# Altium PCB dribblermotordriver.PcbDoc
Units mil, origin at the board's own origin, x right, y up, seen from the top; angles counter-clockwise.
Board outline 2330 x 1127.57 mil, 2 copper layers (Top Layer, Bottom Layer), stack 61.8 mil thick; 47 components, 47 nets, 228 pads, 238 vias.
Unrouted connection lines stored in the file: 7.
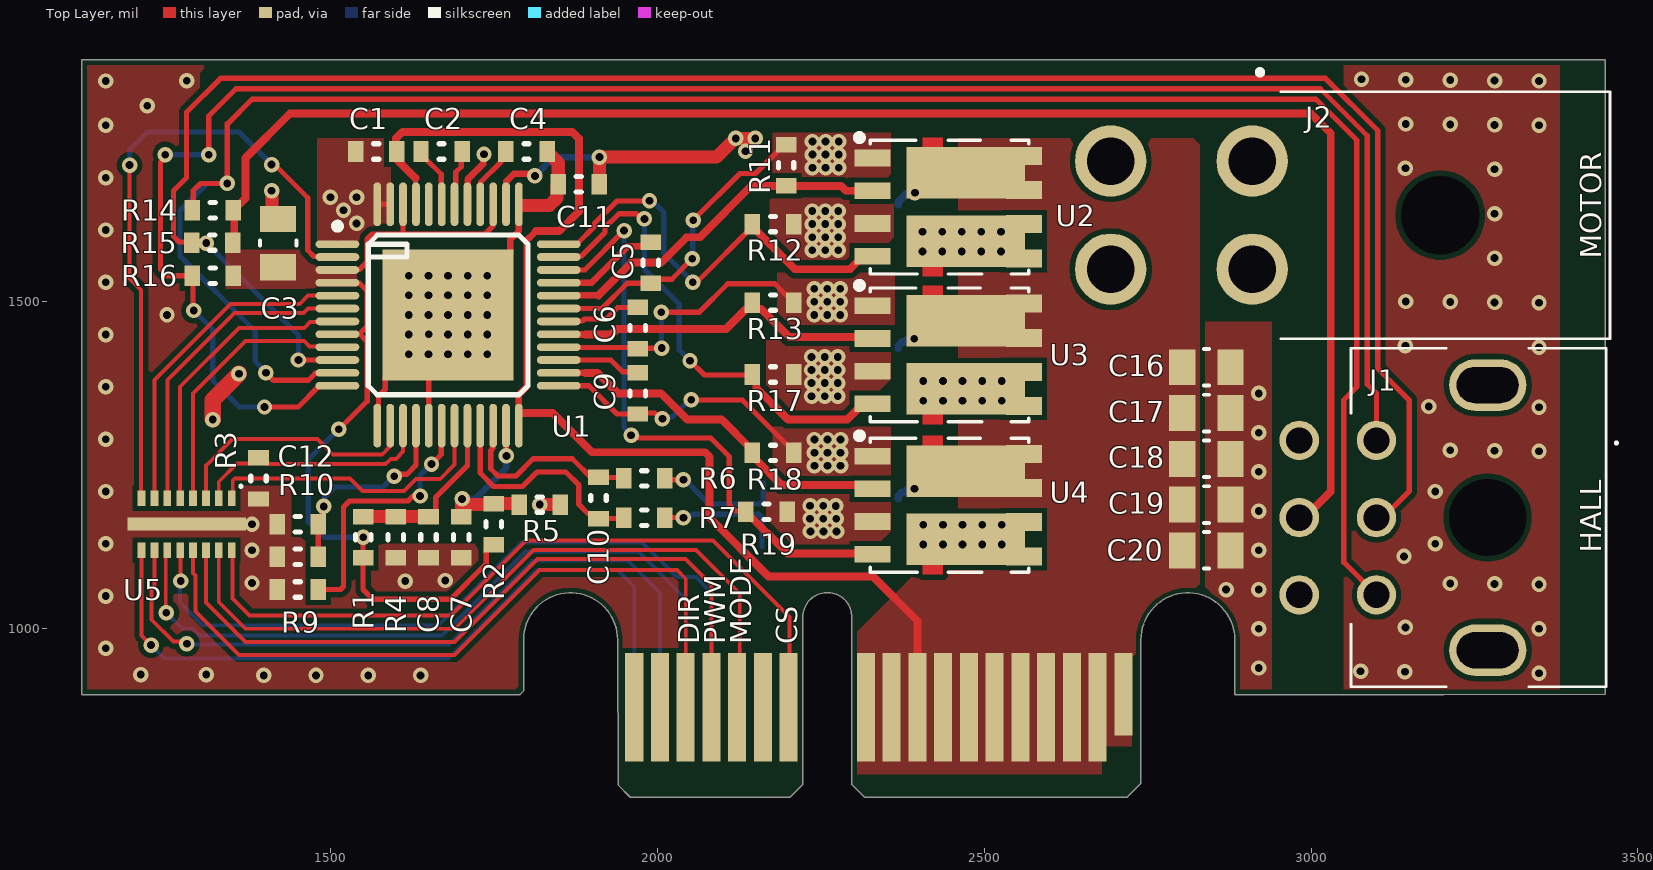
[diagram p0: Top Layer view]
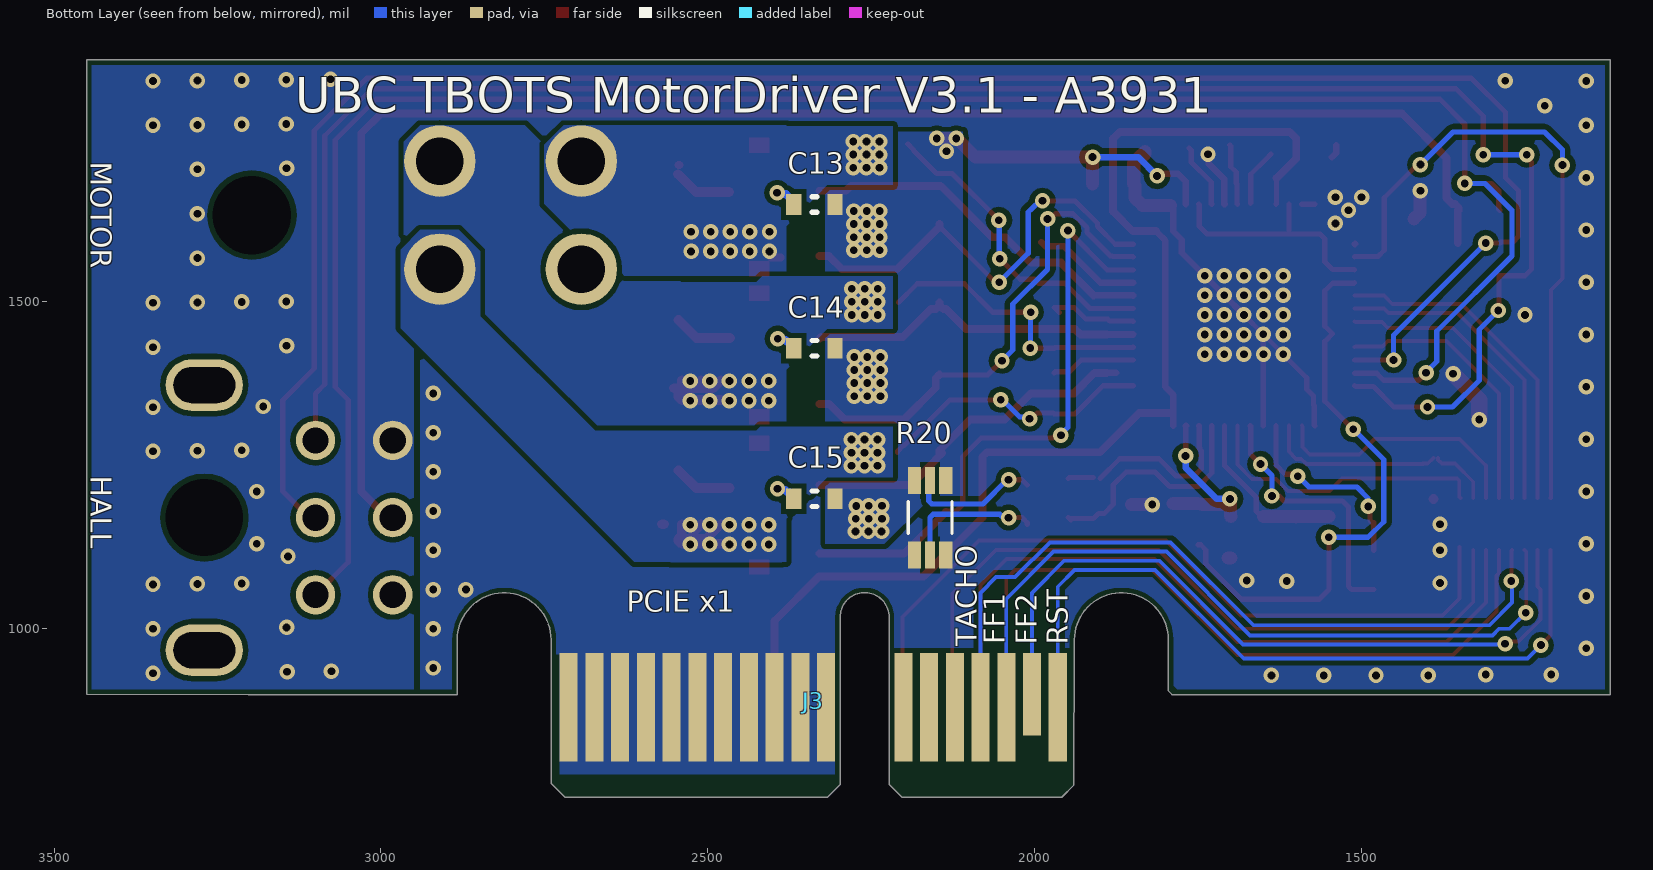
[diagram p1: Bottom Layer view, seen from below]

## Layer stack, top to bottom
Top Solder: solder mask 0.4, Solder Resist, Dk 3.5
Top Layer: signal copper 1.4
Dielectric 1: dielectric 59, FR-4, Dk 4.8
Bottom Layer: signal copper 1.4
Bottom Solder: solder mask 0.4, Solder Resist, Dk 3.5

## Board outline
1940,761.01 1958.57,742.43 2203.09,742.43 2222.69,762.03 2222.69,1017.99 cw(c2260.09,1017.99) 2297.49,1017.99 2297.49,761.57 2316.59,742.48 2718.89,742.48 2739.63,763.22 2739.63,983.02 cw(c2811.48,983.02) 2883.33,983.02 2883.33,899.37 3203.21,899.37 3450,899.85 3450,1870 1120,1870 1120,899.37 1790,899.37 1795.44,904.82 1795.44,983.2 cw(c1867.31,983.2) 1939.17,983.2

## Design rules (kind name [scope] priority, off if disabled: settings)
BoardOutlineClearance [All] p1: gap=7.87 ignorepadtopadclearanceinfootprint=FALSE except(15.75: Arc-SplitBarrior Arc-SplitContinuation Track-SplitBarrior Track-SplitContinuation SMDPad-SplitBarrior SMDPad-SplitContinuation THPad-SplitBarrior THPad-SplitContinuation Via-SplitBarrior Via-SplitContinuation Fill-SplitBarrior Fill-SplitContinuation Poly-SplitBarrior Poly-SplitContinuation Region-SplitBarrior Region-SplitContinuation Text-SplitBarrior Text-SplitContinuation)
Clearance "Clearance Bottom Layer" [OnLayer('Bottom Layer')] p1: gap=8 ignorepadtopadclearanceinfootprint=TRUE except(10: Arc-Text Track-Text SMDPad-Text THPad-Text Via-Text Fill-Text Poly-Text Region-Text Text-Text)
Clearance "Clearance Top Layer" [OnLayer('Top Layer')] p2: gap=8 ignorepadtopadclearanceinfootprint=TRUE except(10: Arc-Text Track-Text SMDPad-Text THPad-Text Via-Text Fill-Text Poly-Text Region-Text Text-Text)
Clearance [All] p3: gap=7.87 ignorepadtopadclearanceinfootprint=FALSE except(3.5: Arc-Arc Arc-Track Arc-SMDPad Track-Track Track-SMDPad SMDPad-SMDPad; 5: Arc-Via Track-Via SMDPad-Via THPad-Via Via-Via; 10: Arc-Text Track-Text SMDPad-Text THPad-Text Via-Text Fill-Text Poly-Text Region-Text Text-Text)
HoleSize [All] p1: absolutevalues=TRUE maxlimit=248.03 minlimit=7.87 maxpercent=80.000 minpercent=20.000
MinimumAnnularRing [All] p1: minimumring=3
MinimumSolderMaskSliver [All] p1: minsoldermaskwidth=3.94
PolygonConnect PolygonConnect_4 [All vs IsNamedPolygon('NONET_L01_P-001') Or IsNamedPolygon('NONET_L01_P-001') Or IsNamedPolygon('NONET_L01_P-001') Or IsNamedPolygon('NONET_L01_P-001') Or IsNamedPolygon('NONET_L01_P-001') Or IsNamedPolygon('NONET_L01_P-001') Or IsNamedPolygon('NONET_L01_P-001') Or IsNamedPolygon('NONET_L01_P-001') Or IsNamedPolygon('NONET_L01_P-001') Or IsNamedPolygon('NONET_L01_P-001') Or IsNamedPolygon('NONET_L01_P-001') Or IsNamedPolygon('NONET_L01_P-001') Or IsNamedPolygon('NONET_L01_P-001') Or IsNamedPolygon('NONET_L01_P-001') Or IsNamedPolygon('NONET_L01_P-001') Or IsNamedPolygon('NONET_L01_P-001') Or IsNamedPolygon('NONET_L01_P-001') Or IsNamedPolygon('NONET_L01_P-001') Or IsNamedPolygon('NONET_L01_P-001') Or IsNamedPolygon('NONET_L01_P-001') Or IsNamedPolygon('NONET_L01_P-001') Or IsNamedPolygon('NONET_L01_P-001')] p1: connectstyle=Direct reliefconductorwidth=10 reliefentries=4 polygonreliefangle="90 Angle" airgapwidth=10
PolygonConnect PolygonConnect_3 [All vs IsNamedPolygon('NONET_L01_P-001') Or IsNamedPolygon('NONET_L01_P-001') Or IsNamedPolygon('NONET_L01_P-001') Or IsNamedPolygon('NONET_L01_P-001') Or IsNamedPolygon('NONET_L01_P-001') Or IsNamedPolygon('NONET_L01_P-001') Or IsNamedPolygon('NONET_L01_P-001') Or IsNamedPolygon('NONET_L01_P-001') Or IsNamedPolygon('NONET_L01_P-001') Or IsNamedPolygon('NONET_L01_P-001') Or IsNamedPolygon('NONET_L01_P-001') Or IsNamedPolygon('NONET_L01_P-001') Or IsNamedPolygon('NONET_L01_P-001') Or IsNamedPolygon('NONET_L01_P-001') Or IsNamedPolygon('NONET_L01_P-001') Or IsNamedPolygon('NONET_L01_P-001') Or IsNamedPolygon('NONET_L01_P-001') Or IsNamedPolygon('NONET_L01_P-001') Or IsNamedPolygon('NONET_L01_P-001') Or IsNamedPolygon('NONET_L01_P-001') Or IsNamedPolygon('NONET_L01_P-001') Or IsNamedPolygon('NONET_L01_P-001')] p2: connectstyle=Direct reliefconductorwidth=10 reliefentries=4 polygonreliefangle="90 Angle" airgapwidth=10
PolygonConnect PolygonConnect_2 [All vs IsNamedPolygon('NONET_L01_P-001') Or IsNamedPolygon('NONET_L01_P-001') Or IsNamedPolygon('NONET_L01_P-001') Or IsNamedPolygon('NONET_L01_P-001') Or IsNamedPolygon('NONET_L01_P-001') Or IsNamedPolygon('NONET_L01_P-001') Or IsNamedPolygon('NONET_L01_P-001') Or IsNamedPolygon('NONET_L01_P-001') Or IsNamedPolygon('NONET_L01_P-001') Or IsNamedPolygon('NONET_L01_P-001') Or IsNamedPolygon('NONET_L01_P-001')] p3: connectstyle=Direct reliefconductorwidth=10 reliefentries=4 polygonreliefangle="90 Angle" airgapwidth=10
PolygonConnect [All vs IsNamedPolygon('NONET_L01_P-001') Or IsNamedPolygon('NONET_L01_P-001') Or IsNamedPolygon('NONET_L01_P-001') Or IsNamedPolygon('NONET_L01_P-001')] p4: connectstyle=Direct reliefconductorwidth=10 reliefentries=4 polygonreliefangle="90 Angle" airgapwidth=10
PolygonConnect PolygonConnect_1 [All] p5: thpad.connectstyle=Relief thpad.reliefconductorwidth=20 thpad.reliefentries=4 thpad.polygonreliefangle="90 Angle" thpad.airgapwidth=10 smdpad.connectstyle=Relief smdpad.reliefconductorwidth=20 smdpad.reliefentries=4 smdpad.polygonreliefangle="90 Angle" smdpad.airgapwidth=10 via.connectstyle=Direct via.reliefconductorwidth=20 via.reliefentries=4 via.polygonreliefangle="90 Angle" via.airgapwidth=10
RoutingCorners [All] p1: cornerstyle=Round minsetback=100 maxsetback=100
RoutingVias [All] p1: holewidth=19.68 width=39.37 viastyle="Through Hole" minholewidth=7.87 minwidth=17.72 maxholewidth=39.37 maxwidth=78.74
SilkToSilkClearance [All] p1: silktosilkclearance=3.94
SilkToSolderMaskClearance [IsPad] p1: minsilkscreentomaskgap=3.94 clearancetoexposedcopper=TRUE
SolderMaskExpansion [All] p1: expansion=4 istentingtop=FALSE
Width [All] p1: maxlimit=100 minlimit=3.5 preferedwidth=15
25 further rules are at their usual default settings.

## Classes and differential pairs
net class motordriver-v3.1_IO_Nets: AGND CSOUT CSOUT_OB DIR DIR_OB FF1 FF1_OB FF2 FF2_OB MODE MODE_OB NetU5_5 NetU5_8 PWM PWM_OB RESET RESET_OB TACHO TACHO_OB VCC
component class motordriver-v3.1_IO: C16 C17 C18 C19 C20 J3 U5
net class motordriver-v3.1_power-stage_Nets: 5V AGND CSN_R CSP_R GHA GHB GHC GLA GLB GLC GND_R M_H1 M_H2 M_H3 NetC14_2 NetJ2_1 NetJ2_2 NetJ2_3 NetJ2_4 NetJ3_1 NetJ3_2 NetJ3_3 NetJ3_4 NetJ3_5 NetJ3_6 NetR11_2 NetR13_2 NetR17_1 SA SB SC VCC
net class motordriver-v3.1_A3931_Nets: 5V AGND CA CB CC CSN CSN_R CSOUT CSP CSP_R DIR DIRO FF1 FF2 GHA GHB GHC GLA GLB GLC GND_R M_H1 M_H2 M_H3 MODE NetC1_2 NetC2_1 NetC2_2 NetC4_1 NetC9_2 NetC12_2 NetR1_1 NetR3_1 NetR4_1 NetR6_2 NetR9_1 NetU1_1 NetU1_2 NetU1_3 NetU1_4 NetU1_5 NetU1_6 NetU1_8 NetU2_16 NetU2_42 PWM RESET SA SB SC TACHO VCC VDSTH VREF
component class motordriver-v3.1_power-stage: C13 C14 C15 J1 J2 R11 R12 R13 R14 R15 R16 R17 R18 R19 R20 U2 U3 U4
component class motordriver-v3.1_A3931: C1 C2 C3 C4 C5 C6 C7 C8 C9 C10 C11 C12 R1 R2 R3 R4 R5 R6 R7 R9 R10 R25 U1

## Components (designator, comment, footprint, x,y, rotation, side; value= is the part's Value field where it differs from the comment)
C1 "100nF 50V" 0603 1570,1730 r0 top value=100nF
C2 "470nF 50V" 0603 1670,1730 r0 top value=470nF
C3 "10uF 50V" 0805 1420,1590 r270 top value=10uF
C4 "4.7uF" 0603 1800,1730 r0 top
C5 "82nF 50V" 0603 1990,1560 r270 top value=82nF
C6 "82nF 50V" 0603 1970,1460 r270 top value=82nF
C7 "1000pF" 0603 1700,1140 r90 top
C8 "1000pF" 0603 1650,1140 r90 top
C9 "82nF 50V" 0603 1970,1360 r270 top value=82nF
C10 "1000pF" 0603 1910,1200 r90 top
C11 "100nF 50V" 0603 1880,1680 r0 top value=100nF
C12 "1000pF" 0603 1450,1160 r0 top
C13 "100nF 50V" 0603 2336.96,1648.99 r0 bottom value=100nF
C14 "100nF 50V" 0603 2336.96,1428.99 r0 bottom value=100nF
C15 "100nF 50V" 0603 2336.96,1198.99 r0 bottom value=100nF
C16 "10uF 50V" 0805 2840,1400 r0 top value=10uF
C17 "10uF 50V" 0805 2840,1330 r0 top value=10uF
C18 "10uF 50V" 0805 2840,1260 r0 top value=10uF
C19 "10uF 50V" 0805 2840,1190 r0 top value=10uF
C20 "10uF 50V" 0805 2840,1120 r0 top value=10uF
J1 "CN HDR 6POS Molex 43045-0622 (R)" 430450622 3100,1288.11 r90 top
J2 "CN HDR 4POS Molex 26013115 (R)" 26013115 3197.4,1632.68 r90 top
J3 "CN PCIE 36 Card Edge" "CN PCIE EDGE 36CKT" 2260,880 r180 bottom
R1 "56k" 0603 1550,1140 r90 top value=100k
R2 "100k" 0603 1750,1160 r90 top
R3 "JUMPER" 0603 1390,1230 r90 top value=0
R4 "47k" 0603 1600,1140 r90 top
R5 "4.7k" 0603 1820,1190 r0 top
R6 "1k" 0603 1980,1230 r180 top
R7 "1k" 0603 1980,1170 r180 top
R9 "47k" 0603 1450,1060 r180 top value=5.1k
R10 "47k" 0603 1450,1110 r180 top
R11 "495k" 0603 2196.96,1708.99 r270 top
R12 "495k" 0603 2176.96,1618.99 r180 top
R13 "495k" 0603 2176.96,1498.99 r180 top
R14 "10k" 0603 1320,1640 r180 top
R15 "10k" 0603 1319.22,1590.76 r180 top
R16 "10k" 0603 1320,1540 r180 top
R17 "495k" 0603 2176.96,1388.99 r180 top
R18 "495k" 0603 2176.96,1268.99 r180 top
R19 "495k" 0603 2166.96,1178.99 r180 top
R20 "RES 20m 1W" "1206 - Sense" 2160,1170 r270 bottom
U1 "A3931" "48-LQFP-EP (7x7)" 1680,1480 r0 top
U2 "NOTE: Nearing End of Life" PG-TDSON-8-10 2446.96,1645 r0 top
U3 "NOTE: Nearing End of Life" PG-TDSON-8-10 2446.96,1418.99 r0 top
U4 "NOTE: Nearing End of Life" PG-TDSON-8-10 2446.96,1188.99 r0 top
U5 "NUF8402MN" SON50P160X100_HS-17M 1280,1160 r270 top

## Footprints (in the part's own frame and the unit in brackets; to place one, negate y for a bottom-side part, rotate by r counter-clockwise, add the part's x,y. Pads: shape width x height; smd on the part's side, far side on the other; paste and mask are expansions set on the pad)
"48-LQFP-EP (7x7)" [mm]
  oval 1.7x0.3 smd: 1(-4.3,2.75) 2(-4.3,2.25) 3(-4.3,1.75) 4(-4.3,1.25) 5(-4.3,0.75) 6(-4.3,0.25) 7(-4.3,-0.25) 8(-4.3,-0.75) 9(-4.3,-1.25) 10(-4.3,-1.75) 11(-4.3,-2.25) 12(-4.3,-2.75) 25(4.3,-2.75) 26(4.3,-2.25) 27(4.3,-1.75) 28(4.3,-1.25) 29(4.3,-0.75) 30(4.3,-0.25) 31(4.3,0.25) 32(4.3,0.75) 33(4.3,1.25) 34(4.3,1.75) 35(4.3,2.25) 36(4.3,2.75)
  oval 0.3x1.7 smd: 13(-2.75,-4.3) 14(-2.25,-4.3) 15(-1.75,-4.3) 16(-1.25,-4.3) 17(-0.75,-4.3) 18(-0.25,-4.3) 19(0.25,-4.3) 20(0.75,-4.3) 21(1.25,-4.3) 22(1.75,-4.3) 23(2.25,-4.3) 24(2.75,-4.3) 37(2.75,4.3) 38(2.25,4.3) 39(1.75,4.3) 40(1.25,4.3) 41(0.75,4.3) 42(0.25,4.3) 43(-0.25,4.3) 44(-0.75,4.3) 45(-1.25,4.3) 46(-1.75,4.3) 47(-2.25,4.3) 48(-2.75,4.3)
  silkscreen extent -4.42,-3.1 3.1,3.57, body extent -3.5,-3.5 3.5,3.5, height 1.6
0603 [mm] "Chip Resistor, 2-Leads, Body 1.60x0.80mm, IPC High Density"
  rect 0.6x0.8 smd: 1(-0.8,0) 2(0.8,0)
  silkscreen extent -0.1,-0.3 0.1,0.3, body extent -0.8,-0.4 0.8,0.4, height 0.6
0805 [mil]
  rect 40x55 smd: 1(-37,0) 2(37,0)
  silkscreen extent -4,-28 4,28, body extent -47,-28 47,28, height 24
"1206 - Sense" [mil] "4-Wire Sense Footprint"
  rect 41.34x20 smd: 1(-57,-24) 1(-57,24) 2(57,-24) 2(57,24)
  rect 41.34x15 smd paste+0: 3(-57,0) 4(57,0)
  silkscreen extent -24,-33 24,33
26013115 [mm]
  round 2.775 hole 1.85: 1(2.1,7.3) 2(-2.1,7.3) 3(2.1,12.8) 4(-2.1,12.8)
  round 1.525 hole 3.05 unplated: MH1(0,0)
  silkscreen extent -4.8,-6.6 5.6,7.05, body extent -4.8,-6.5 5.2,13.44, height 11.5
430450622 [mm]
  round 1.53 hole 1.02: 1(0,0) 2(-3,0) 3(-6,0) 4(0,3) 5(-3,3) 6(-6,3)
  oval 2x3 hole 1.4 slot 2.4 at 90 deg: MH1(2.15,-4.32) MH2(-8.15,-4.32)
  round 1.524 hole 3: MH_C(-3,-4.32)
  silkscreen extent -9.57,-9.37 3.57,0.99, body extent -9.62,-8.95 3.58,3.29, height 8.83
"CN PCIE EDGE 36CKT" [mm] "PCIE X1 36pin card edge"
  rect 0.7x3.2 smd far side paste-1: A1(-11.5,0.5)
  rect 0.7x4.2 smd far side paste-1: A2(-10.5,0) A3(-9.5,0) A4(-8.5,0) A5(-7.5,0) A6(-6.5,0) A7(-5.5,0) A8(-4.5,0) A9(-3.5,0) A10(-2.5,0) A11(-1.5,0) A12(1.5,0) A13(2.5,0) A14(3.5,0) A15(4.5,0) A16(5.5,0) A17(6.5,0) A18(7.5,0)
  rect 0.7x4.2 smd paste-1: B1(-11.5,0) B2(-10.5,0) B3(-9.5,0) B4(-8.5,0) B5(-7.5,0) B6(-6.5,0) B7(-5.5,0) B8(-4.5,0) B9(-3.5,0) B10(-2.5,0) B11(-1.5,0) B12(1.5,0) B13(2.5,0) B14(3.5,0) B15(4.5,0) B16(5.5,0) B18(7.5,0)
  rect 0.7x3.2 smd paste-1: B17(6.5,0.5)
PG-TDSON-8-10 [mm] "Infineon specific mosfet array footprint"
  rect 1.4x0.65 smd paste-0.1: 1(-2.99,1.905) 2(-2.99,0.635) 3(-2.99,-0.635) 4(-2.99,-1.905)
  rect 4.6x2 smd paste-3: 6(0.625,-1.325) 8(0.625,1.325)
  rect 1.4x0.7 smd paste-0.1: 6(2.89,-1.99) 6(2.89,-0.66) 8(2.89,0.66) 8(2.89,1.99)
  Top Layer region: -1.04,-2.7 -0.25,-2.7 -0.25,-2.1 -1.04,-2.1
  Top Layer region: -1.04,2.1 -0.25,2.1 -0.25,2.7 -1.04,2.7
  silkscreen extent -3.6,-2.6 3.08,2.8, body extent -3.07,-2.57 3.08,2.58, height 1.1
SON50P160X100_HS-17M [mm] "SON, 16-Leads, Body 4.00x1.60mm, Pitch 0.50mm, Thermal Pad 4.10x0.50mm, IPC Low Density"
  rect 0.6x0.3 smd: 1(-1.01,1.75) 2(-1.01,1.25) 3(-1.01,0.75) 4(-1.01,0.25) 5(-1.01,-0.25) 6(-1.01,-0.75) 7(-1.01,-1.25) 8(-1.01,-1.75) 9(1.01,-1.75) 10(1.01,-1.25) 11(1.01,-0.75) 12(1.01,-0.25) 13(1.01,0.25) 14(1.01,0.75) 15(1.01,1.25) 16(1.01,1.75)
  rect 0.5x4.6 smd: GND(0,0)
  silkscreen extent -1.52,2.06 -1.42,2.16, body extent -0.8,-2 0.8,2, height 1

## Part data
C1 C11 C13 C14 C15: library part "CAP 100nF 50V", "CAP CER 0.1UF 50V X7R 0805", Package=0805, Rating=50V, Tolerance=10%
C2: library part "CAP 470nF 50V", "CAP CER 0.1UF 50V X7R 0805", Package=0805, Rating=50V, Tolerance=10%
C3 C16 C17 C18 C19 C20: library part "CAP 10uF 50V", "CAP CER 10UF 50V X7R", Package=1210, Rating=50V, Tolerance=10%, ComponentLink1Description=digikey, ComponentLink1URL=https://www.digikey.ca/en/products/detail/kemet/C1210C106M5RACTU/4918883
C4: library part "CAP 4.7uF 35V", "CAP CER 4.7UF 35V X7R 0603/0805", Operating Temperature="-55°C ~ 125°C", Package=0603/0805, Rating=35V, Temperature Coefficient=X7R, Tolerance=10%
C5 C6 C9: library part "CAP 82nF 50V", "CAP CER 0.082UF 50V X7R 0805", Alt. Value=82nF, Package=0805, Rating=50V, Tolerance=5%
C7 C8 C10 C12: library part "CAP 1000pF 50V", "CAP CER 1000PF 50V X7R 0603/0805", Operating Temperature="-55°C ~ 125°C", Package=0603/0805, Rating=50V, Temperature Coefficient=X7R, Tolerance=10%
J1: "Molex 43045-0622 6POS Microfit / dual row, right angle"
J2: "Molex 26013115 4POS Minifit / dual row, right angle"
J3: "36 Position Male PCIE Connector"
R1 R2: library part "RES 100k 1/8W - 1%", "RES SMD 100K OHM 1% 1/8W 0805", Package=0805, Power (Watts)=0.125W, Tolerance=1%
R3: library part "RES 0 JUMPER", "RES SMD 0 OHM JUMPER GENERIC 0805", Package=0805
R4 R10: library part "RES 47k 1/8W - 1%", "RES SMD 47K OHM 1% 1/8W 0805", Package=0805, Power (Watts)=0.125W, Tolerance=1%
R5: library part "RES 4.7k 1/8W - 1%", "RES SMD 4.7k OHM 1% 1/8W 0805", Package=0805, Power (Watts)=0.125W, Tolerance=1%
R6 R7: library part "RES 1k 1/8W", "RES SMD 1K OHM 5% 1/8W 0805", Package=0805, Power (Watts)=0.125W, Tolerance=5%
R9: library part "RES 5.1k 1/8W - 1%", "RES SMD 5.1K OHM 1% 1/8W 0805", Package=0805, Power (Watts)=0.125W, Tolerance=1%
R11 R12 R13 R17 R18 R19: library part "RES 495k 1/8W", "RES SMD 499K OHM 1% 1/8W 0805", Case Code (Imperial)=0805, Case Code (Metric)=2012, Manufacturer=Yageo, Manufacturer Part Number=RC0805FR-07499KL, Max Operating Temperature=155°C, Min Operating Temperature=-55°C, Power Rating=125mW, Resistance=499kR, Supplier Part Number 1=311-499KCRCT-ND, Temperature Coefficient=100ppm/°C, Tolerance=1%, Voltage Rating=150V, Case/Package=0805, Category="Chip SMD Resistors", ComponentLink1Description=https://datasheet.ciiva.com/15189/getdatasheetpartid-326570-15189975.pdf?src-supplier=Verical, ComponentLink1URL=https://datasheet.ciiva.com/15189/getdatasheetpartid-326570-15189975.pdf?src-supplier=Verical, Composition="Thick Film", Contact Plating=Tin,Lead,Matte, Depth=1.25mm, Lead Free="Lead Free", Length=2mm, Military Standard=Not, Packaging="Tape and Reel", Pricing 1="1=0.10000, 10=0.04000, 100=0.01630, 1000=0.00731, 2500=0.00635 (USD)", Radiation Hardening=No, RoHS=Yes, Stock 1=2275, Supplier 1=Digi-Key, Termination=SMD/SMT, Voltage Rating (DC)=150V
R14 R15 R16: library part "RES 10k 1/8W - 1%", "RES SMD 10K OHM 1% 1/8W 0805", Package=0805, Power (Watts)=0.125W, Tolerance=1%
R20: "RES SMD 0.02 OHM 1% 1W 1206"
U1: library part A3931_A1, "IC MOTOR DRIVER 5.5V-50V 48LQFP - Alternative Symbol", Supplier Part Number 1=620-1290-1-ND, Digikey=620-1290-1-ND, Digikey Link=https://www.digikey.ca/product-detail/en/allegro-microsystems/A3931KJPTR-T/620-1290-1-ND/2000021, Supplier 1=Digi-Key
U2 U3 U4: library part "MOSFET IPG20N06S4-15A", "MOSFET N+N 60V 20A", Supplier Part Number 1=726-IPG20N06S415ATMA, MF="Infineon Technologies", MF P/N=IPG20N06S4-15A, Supplier 1=Mouser
U5: library part "EMI FILTER NUF8402MN", "EMI Filter 8ch 105Mhz 100Ohm", Supplier Part Number 1=NUF8402MNT4GOSCT-ND, Supplier 1=Digi-Key

## Free pads (board coordinates)
  rect 200x200 smd: 2(1680,1480)

## Via types
v1: diameter 23.62, hole 11.81, Top Layer to Bottom Layer, tented both sides, 149 vias
v2: diameter 23.62, hole 11.81, Top Layer to Bottom Layer, tented bottom, 57 vias
v3: diameter 23.62, hole 11.81, Top Layer to Bottom Layer, 32 vias

## Nets (pads, with @x,y where several pads share a name; then routed paths per layer and width w, separated by ;. In a path a pad name is that pad's centre, name@x,y a point inside that pad or via, vN(x,y) a via of type N, cw(c..) or ccw(c..) an arc to the next point about the centre after c; other vN are vias at no path point)
5V: C3.2 J1.5 R1.1 R2.1 R14.1 R15.1 R16.1 U1.3 U1.4 U1.8 U1.39 U1.46 | length 3715.6
  Top Layer w8: U1.4 1511.44,1528.48 1544.63,1528.48 1556.17,1516.94 1556.17,1462.74 1544.63,1451.2 1556.17,1439.66 1556.17,1348.03 1513.32,1305.18 v3(1512.58,1305.18) ; U1.3@1510.71,1548.68 U1.3 1511.44,1549.63 1544.63,1549.63 1556.17,1561.17 1556.17,1596.17 1563.83,1603.83 1610.86,1603.83 ; v1(1550,1139.87) 1550,1060 1565,1045 1683.79,1045 1738.21,1099.42 1738.21,1116.01 1738.25,1116.05 1738.25,1120.69 1746.06,1128.5 R2.1 ; U1.46 1610.86,1649.05 1610.86,1603.83 ; U1.39 1748.17,1648.56 1748.17,1615.37 1736.63,1603.83 1610.86,1603.83
  Top Layer w12: R14.1 1351.5,1643.94 1357.31,1649.75 1361.24,1649.75 1370,1658.5 1370,1720 1437.95,1787.95 3000,1787.95 3030,1757.95 3030,1210 J1.5@2970.76,1150.76 ; R15.1@1352.99,1590 R14.1@1352.99,1640
  Bottom Layer w8: v3(1512.58,1305.18) 1466.19,1258.79 1466.19,1163.81 1490.13,1139.87 v1(1550,1139.87)
AGND: C1.1 C3.1 C4.2 C7.1 C8.1 C11.1 C12.1 C16.2 C17.2 C18.2 C19.2 C20.2 J1.4 J3.B1 J3.B2 J3.B3 J3.B4 J3.B5 J3.B6 J3.B7 J3.B8 J3.B9 J3.B10 J3.B11 pad.2 R3.1 R4.1 R5.2 R9.2 R10.2 R20.2 U1.1 U1.13 U1.17 U1.37 U1.41 U1.47 U1.48 U5.GND | length 1005.7
  Top Layer w8: U1.13 1572.46,1311.44 1572.46,1341.69 1573.51,1342.74 1573.51,1356.17 1584,1366.66 1584,1384 v2(1650.47,1450.47) ; U1.48 U1.47 ; U1.17 v2(1650.47,1450.47) ; v2(1680,1480) v2(1650.47,1450.47)
  Top Layer w10: U1.1@1510,1588.98 U1.1 ; C1.1@1538.5,1739.64 C1.1 1538.5,1728.17 C1.1@1545.31,1721.36 ; v2(1680,1480) v2(1710,1510) v2(1740,1540) 1775,1575 1775,1595.14 1787.92,1608.06 1787.92,1648.94 U1.37 ; U1.41 1709.87,1649.64 1709.87,1687.19 1733.43,1710.74 1733.43,1724.5 v3(1734.9,1725.97)
  Top Layer w20: v3(1410,1670) 1410.69,1669.31 1410.69,1636.31 C3.1 ; C7.1 C7.1@1703.94,1108.5 ; U1.37@1792.49,1647.51 1834.98,1647.51 1846.69,1659.23 1846.69,1678.19 C11.1 1848.5,1712.54 1836.79,1724.25 1833.31,1724.25 1831.5,1726.06 C4.2 ; v1(1820.13,1190) R5.2
  Top Layer w25: v1(1320,1320) 1320,1350 v1(1360,1390)
  other v1: 1397.91,928.67 1477.91,928.67 1557.91,928.67 1637.91,928.67 1210,930 1310,930 3348.61,932.12 3143.59,934.21 3075.72,934.91 2920,940 1156.19,970 2920,1000 3348.61,1000 3144.29,1002.09 1156.19,1050 2870,1060 2920,1060 3348.61,1067.88 3212.86,1069.27 3280.73,1068.57 1380,1070 1614.38,1073 1675.5,1073.87 3142.12,1110.7 1380,1120 2920,1120 1156.19,1130 3190,1130 1380,1160 2920,1180 1156.19,1210 3190,1210 2920,1240 3280.73,1272.2 3348.61,1271.5 3212.86,1272.89 1156.19,1290 2920,1300 3348.61,1339.01 3180,1340 2920,1360 1156.19,1370 3348.61,1430.62 3144.29,1432.71 1156.19,1450 1250,1480 3348.61,1498.5 3280.73,1499.19 3212.86,1499.89 3144.98,1500.58 1156.19,1530 3280.73,1567.07 1156.19,1610 3280.73,1634.94 1156.19,1690 3280.73,1702.82 3144.29,1704.21 1156.19,1770 3348.61,1770 3212.86,1771.39 3280.73,1770.7 3144.98,1772.09 1220,1800 1156.19,1837.88 1280.34,1838.25 3348.61,1837.88 3212.86,1839.27 3280.73,1838.57 3144.98,1839.96 3077.11,1840.66
  other v2: 1620,1420 1650,1420 1680,1420 1710,1420 1740,1420 1620,1450 1680,1450 1710,1450 1740,1450 1620,1480 1650,1480 1710,1480 1740,1480 1620,1510 1650,1510 1680,1510 1740,1510 1620,1540 1650,1540 1680,1540 1710,1540
  other v3: 1540,1620 1520,1640 1500,1660 1540,1660
CA: C5.1 U1.33 | length 166.5
  Top Layer w10: U1.33 1849.64,1529.56 1899.56,1529.56 1955.03,1585.03 1983.53,1585.03 C5.1
CB: C6.1 U1.30 | length 140.3
  Top Layer w8: U1.30 1850.02,1470.89 1885.43,1470.89 1888.39,1473.84 1921.93,1473.84 1939.58,1491.5 C6.1 C6.1@1962.39,1483.88
CC: C9.1 U1.27 | length 128.8
  Top Layer w8: U1.27 1928.9,1411.1 1946.94,1393.06 1968.43,1393.06 C9.1
CSN: C10.1 R7.2 U1.21 | length 359.1
  Top Layer w8: U1.21 1729.21,1259.77 1729.21,1238.16 1749.62,1217.75 1793.69,1217.75 1815.94,1240 1860,1240 1880,1220 1880,1190 1893.69,1176.31 1902.19,1176.31 C10.1 1942.63,1168.5 1944.82,1166.31 R7.2
CSN_R: R7.1 R20.4 | length 203.4
  Top Layer w8: R7.1@2011.5,1160 2011.5,1162.19 2019.31,1170 v3(2040,1170)
  Bottom Layer w8: v3(2040,1170) 2042.99,1172.99 2051.49,1172.99 2053.51,1175.01 2155.31,1175.01 2160,1170.32 R20.4@2160,1124.89
CSOUT: U1.19 U5.1 | length 452.5
  Top Layer w6: U5.1 1350.62,1201.49 1350.62,1226.49 1354.14,1230 1530,1230 1549.34,1210.66 1612.28,1210.66 1630.79,1229.18 1667.96,1229.18 1689.84,1251.06 U1.19
CSOUT_OB: J3.A12 U5.16 | length 1175.6
  Top Layer w6: U5.16@1350,1124.83 1350,1046.31 1376.31,1020 1684.61,1020 1799.32,1134.71 2085.29,1134.71 2201.89,1018.11 2201.89,880.95 J3.A12
CSP: C10.2 R6.2 U1.22 | length 289.2
  Top Layer w8: U1.22 1748.17,1309.98 1748.17,1277 1747.69,1276.52 1747.69,1275.04 1745.21,1272.56 1745.21,1253.15 1745.21,1244.79 1756.25,1233.75 1783.75,1233.75 1810,1260 1870,1260 C10.2@1900,1230 ; C10.2 1947.01,1231.5 R6.2
CSP_R: R6.1 R20.3 | length 199.1
  Top Layer w8: R6.1@2011.5,1220 2011.5,1220.08 2019.31,1227.89 v3(2040,1227.89)
  Bottom Layer w8: v3(2040,1227.89) 2042.11,1227.89 2078.99,1191.01 2157.31,1191.01 2162,1195.7 R20.3@2162,1223.72
DIR: U1.9 U5.4 | length 418
  Top Layer w6: U5.4 1289.84,1359.84 1370,1440 1460,1440 1468.1,1431.9 1509.6,1431.9 U1.9
DIR_OB: J3.A16 U5.13 | length 1128.7
  Top Layer w6: U5.13 1290,1120.08 1290,1085.54 1293.85,1081.7 1293.85,1026.15 1360,960 1690,960 1820,1090 2030,1090 2043.46,1076.54 J3.A16
DIRO: U1.44
FF1: U1.6 U5.6 | length 486.2
  Top Layer w6: U5.6 1250.63,1199.92 1250.63,1380.63 1353.05,1483.05 1458.84,1483.05 1465.64,1489.84 U1.6
FF1_OB: J3.B16 U5.11 | length 1154.4
  Top Layer w6: v3(1249.07,1024.41) 1248.12,1025.37 1248.12,1117.88 U5.11
  Bottom Layer w6: v3(1249.07,1024.41) 1273.48,1000 1290,1000 1300,990 1670.55,990 1798.55,1118 1971.05,1118 2043.46,1045.59 J3.B16
FF2: U1.5 U5.7 | length 514.3
  Top Layer w6: U5.7 1230.79,1380.79 1347.05,1497.05 1453.05,1497.05 1465.53,1509.53 U1.5
FF2_OB: J3.B17 U5.10 | length 1130.4
  Top Layer w6: U5.10 1230.79,1064.85 1226.26,1060.32 1226.26,1013.74 1259.74,980.26 1277.48,980.26 v3(1280.55,977.19)
  Bottom Layer w6: v3(1280.55,977.19) 1281.74,976 1681.36,976 1809.36,1104 1955.05,1104 2004.09,1054.96 J3.B17
GHA: R11.2 U1.32 U2.2 | length 552.6
  Top Layer w10: U1.32 1849.64,1509.87 1909.87,1509.87
  Top Layer w12: 1909.87,1509.87 1960,1560 2005.86,1560 2044.81,1598.94 2065.29,1598.94 2143.84,1677.49 R11.2 2281.01,1677.49 2288.5,1670 U2.2
GHB: R13.2 U1.29 U3.2 | length 523.9
  Top Layer w10: U1.29 1849.64,1450.13 1889.87,1450.13 1890,1450
  Top Layer w12: 1890,1450 1930,1450 1938.5,1458.5 2104.98,1458.5 2135.72,1489.24 2139.65,1489.24 R13.2@2145.46,1495.05 ; R13.2 R13.2@2145.46,1495.05 ; U3.2 2326.97,1446.26 2201.83,1446.26 2158.86,1489.24 2151.27,1489.24 R13.2@2145.46,1495.05
GHC: R18.2 U1.26 U4.2 | length 531.2
  Top Layer w10: U1.26@1875.26,1391.42 1890,1391.42
  Top Layer w12: 1890,1391.42 1908.58,1391.42 1940,1360 2005.83,1360 2045.83,1320 2098.39,1320 2144.69,1273.7 2145.46,1272.93 R18.2 ; R18.2@2141.78,1268.73 2151.27,1259.24 2151.27,1258.73 2190,1220 U4.2@2329.24,1220
GLA: R12.2 U1.36 U2.4 | length 687.7
  Top Layer w8: U1.36 1876.85,1588.27 1904,1615.42 1904,1620.28 1938.21,1654.49 v1(1988.09,1654.49) ; v1(2054.39,1530) 2057.38,1532.99 2063.4,1532.99 R12.2@2145.46,1615.05
  Top Layer w12: R12.2 2145.46,1615.05 2210.52,1550 2294.48,1550 2314.48,1570 U2.4 ; 2388.5,1568.15 2403.27,1568.15
  Bottom Layer w8: v1(1988.09,1654.49) 1992.32,1654.49 2004.08,1642.73 2004.34,1642.73 2010,1637.07 2010,1574.39 v1(2054.39,1530)
GLB: R17.2 U1.35 U3.4 | length 747.8
  Top Layer w8: U1.35 1850.02,1569.31 1880.27,1569.31 1881.32,1570.36 1884.27,1570.36 1920,1606.1 1920,1613.65 1941.27,1634.93 1968.11,1634.93 1976.08,1626.95 v1(1980.31,1626.95) ; v1(2050,1410) 2071.97,1388.03 2144.5,1388.03 R17.2
  Top Layer w12: R17.2 2151.27,1383.18 2151.27,1368.73 2200,1320 2290.49,1320 2314.48,1343.99 U3.4
  Bottom Layer w8: v1(1980.31,1626.95) 1980.31,1549.69 2033.49,1496.51 2033.49,1426.51 v1(2050,1410)
GLC: R19.2 U1.34 U4.4 | length 929.8
  Top Layer w8: U1.34 1888.92,1548.9 v1(1949.16,1609.13) ; v1(1959.85,1295.81) 1962.84,1292.82 1971.23,1292.82 1972.35,1291.7 2081.64,1291.7 2110,1263.34 2110,1190 2120,1180 2134.45,1180 R19.2
  Top Layer w12: R19.2 2199.45,1115 U4.4@2329.24,1115
  Bottom Layer w8: v1(1949.16,1609.13) 1949.16,1308.31 1959.85,1297.61 v1(1959.85,1295.81)
GND_R: C11.2 C13.1 C14.1 C15.1 R12.1 R17.1 R19.1 R20.1 U1.38 U2.3 U3.3 U4.3 | length 487.1
  Top Layer w10: U1.38@1768.8,1649.51 1768.93,1649.64 1768.93,1684.25 1780.44,1695.76 1806.09,1695.76 1809.16,1692.69 v3(1812.84,1692.69)
  Top Layer w20: C11.2 v3(1911.5,1721.5) 2090.52,1721.5 2119.02,1750 v3(2150,1750)
  Bottom Layer w10: v3(1812.84,1692.69) 1841.65,1721.5 v3(1911.5,1721.5)
  other v1: 2234.18,1148.79 2254.18,1148.79 2274.18,1148.79 2233.65,1168.35 2253.65,1168.35 2273.65,1168.35 2233.65,1188.35 2253.65,1188.35 2273.12,1187.92 2235.98,1355.84 2255.98,1355.84 2275.98,1355.84 2235.98,1375.84 2255.98,1375.84 2275.98,1375.84 2235.98,1395.84 2255.98,1395.84 2275.98,1395.84 2235.98,1415.84 2255.98,1415.84 2275.98,1415.84 2236.96,1578.99 2256.96,1578.99 2276.96,1578.99 2236.96,1598.99 2256.96,1598.99 2276.96,1598.99 2236.96,1618.99 2256.96,1618.99 2276.96,1618.99 2236.96,1638.99 2256.96,1638.99 2276.96,1638.99
  other v3: 2134.91,1730.21 2120,1750
M_H1: J1.1 R16.2 U1.12 | length 3041.4
  Top Layer w8: v3(1247.4,1725.24) 1247.4,1721.01 1240,1713.61 1240,1550 1250,1540 R16.2 1289.73,1538.78 1289.73,1488.03 v3(1290.95,1486.81) ; v3(1313.81,1725.24) 1313.81,1784.26 1355.49,1825.95 3014.05,1825.95 3085.91,1754.09 3085.91,1374.09 3100,1360 J1.1 ; v3(1399.17,1339.26) 1450.68,1339.26 1481.9,1370.49 1509.46,1370.49 U1.12
  Bottom Layer w8: v3(1247.4,1725.24) v3(1313.81,1725.24) ; v3(1290.95,1486.81) 1320,1457.76 1320,1380 1360.74,1339.26 v3(1399.17,1339.26)
M_H2: J1.2 R15.2 U1.10 | length 3064.2
  Top Layer w8: v1(1310,1590) 1288.48,1590 1286.69,1591.79 1268.6,1591.79 1260,1600.38 1260,1670 1280,1690 1280,1790 1331.95,1841.95 3022.01,1841.95 3101.91,1762.05 3101.91,1398.09 3150,1350 3150,1210 3110,1170 J1.2 ; v3(1451.1,1411.1) U1.10
  Bottom Layer w8: v1(1310,1590) 1451.1,1448.9 v3(1451.1,1411.1)
M_H3: J1.3 R14.2 U1.11 | length 3183.4
  Top Layer w8: R14.2 1290,1641.5 1290,1670 1301.16,1681.16 v3(1342.32,1681.16) 1342.32,1772.32 1379.95,1809.95 3007.43,1809.95 3069.91,1747.47 3069.91,1369.91 3050,1350 3050,1101.89 J1.3 ; v3(1401.36,1391.61) 1412.97,1380 1466.1,1380 1476.78,1390.69 1509.98,1390.69 U1.11
  Bottom Layer w8: v3(1342.32,1681.16) 1311.16,1681.16 1270,1640 1270,1570 1384.99,1455.01 1384.99,1408.92 1401.36,1392.55 v3(1401.36,1391.61)
MODE: R3.2 U1.15 U5.2 | length 368.2
  Top Layer w6: U5.2 1329.21,1224.88 1357.02,1252.68 1377.25,1252.68 1382.99,1258.43 R3.2@1382.99,1261.51 ; R3.2 1398.81,1252.68 1405.82,1252.68 1406.26,1252.24 1584.53,1252.24 1592.29,1260 1600,1260 1611.1,1271.1 U1.15
MODE_OB: J3.A14 U5.15 | length 1146.4
  Top Layer w6: U5.15 1329.21,1040.79 1370,1000 1690.2,1000 1810.91,1120.71 2059.29,1120.71 2126.08,1053.92 2126.08,883.88 J3.A14
NetC2_1: C2.1 U1.43 | length 88.5
  Top Layer w8: C2.1@1638.5,1726.06 1646.31,1718.25 1669.43,1695.14 1669.43,1651.16 U1.43@1670,1650.59
NetC2_2: C2.2 U1.42 | length 95.5
  Top Layer w8: U1.42 1690.57,1650.02 1690.57,1680.27 1691.62,1681.32 1691.62,1698.44 1700,1706.81 1700,1738.5 C2.2@1701.5,1740
NetC4_1: C4.1 U1.40 | length 100.1
  Top Layer w8: U1.40 1729.94,1650.02 1729.94,1683.22 1760.69,1713.97 1760.69,1732.19 C4.1@1763.66,1735.16
NetC12_2: C12.2 R10.1 U1.16 | length 298
  Top Layer w8: R10.1@1481.5,1120 C12.2@1481.5,1162.75 ; C12.2 1487.01,1165.51 1487.01,1184.2 v3(1490,1187.19) ; v3(1597.5,1233.48) 1600.49,1236.46 1616.87,1236.46 1630.79,1250.38 U1.16
  Bottom Layer w8: v3@1490,1197.19 1490,1199.64 1507.02,1216.66 1580.65,1216.66 v3(1597.5,1233.48)
NetR9_1: R9.1 U1.18 | length 407.3
  Top Layer w8: R9.1 1515.31,1060 1520,1064.69 1520,1186.03 1529.28,1195.31 1618.44,1195.31 1625.8,1202.66 1636.69,1202.66 v3(1637.15,1203.12) ; v3(1654.6,1251.99) 1669.43,1266.82 1669.43,1309.98 U1.18
  Bottom Layer w8: v3(1637.15,1203.12) 1637.15,1234.54 v3(1654.6,1251.99)
PWM: U1.14 U5.3 | length 395.3
  Top Layer w6: U5.3 1310,1200.24 1310,1250 1350,1290 1480,1290 1503.76,1266.24 1578.73,1266.24 1590.31,1277.81 1590.31,1309.6 U1.14
PWM_OB: J3.A15 U5.14 | length 1134.1
  Top Layer w6: U5.14 1309.94,1119.82 1309.94,1040.06 1370,980 1690,980 1816.71,1106.71 2043.29,1106.71 2082.83,1067.17 J3.A15
RESET: U1.2 U5.8 | length 996.2
  Top Layer w6: v3(1192.79,1709.22) 1192.79,1535.99 1210.54,1518.24 1210.54,1200.33 U5.8
  Top Layer w8: v3(1410,1710) 1411.86,1708.14 1416.43,1708.14 1465.24,1659.32 1465.24,1578.88 1474.82,1569.31 1509.98,1569.31 U1.2
  Bottom Layer w8: v3(1192.79,1709.22) 1192.79,1732.79 1220,1760 1360,1760 v3(1410,1710)
RESET_OB: J3.B18 U5.9 | length 1150
  Top Layer w6: U5.9 1211.1,989.96 1225.6,975.46 v3(1225.6,975.03)
  Bottom Layer w6: v3(1225.6,975.03) 1246.25,954.38 1680.23,954.38 1815.85,1090 1939.05,1090 1964.72,1064.33 J3.B18
SA: C5.2 J2.3 R11.1 U1.31 U2.1 U2.6 | length 505.8
  Top Layer w8: U1.31 1915.3,1489.84 1953.96,1528.5 1993.94,1528.5 2000.13,1534.7 2021.98,1534.7 v1(2053.43,1566.16) ; v1(2054.82,1624.98) 2126.34,1696.5 2149.97,1696.5 2185.21,1731.74 2185.21,1732.68 R11.1@2194.03,1741.5 ; v1@2237.33,1744.7 2237.97,1745.34 2258.75,1745.34 v1@2259.39,1744.7
  Bottom Layer w8: v1(2053.43,1566.16) 2054.13,1566.85 2054.13,1624.29 v1(2054.82,1624.98)
  other v1: 2237.33,1705.34 2257.33,1705.34 2277.33,1705.34 2237.33,1725.34 2257.33,1725.34 2277.33,1725.34 2237.33,1745.34 2257.33,1745.34 2277.33,1745.34
  other v2: 2405.66,1577.14 2435.66,1577.14 2465.66,1577.14 2495.66,1577.14 2525.66,1577.14 2405.66,1607.14 2435.66,1607.14 2465.66,1607.14 2495.66,1607.14 2525.66,1607.14
SB: C6.2 J2.1 R13.1 U1.28 U3.1 U3.6 | length 646.4
  Top Layer w8: U1.28 1850.02,1430.06 1968.45,1430.06 C6.2 1970.42,1428.92 2006.35,1428.92 v1(2006.77,1429.34) ; v1(2006.19,1484.32) 2064.32,1484.32 2107.75,1527.75 2179.7,1527.75 R13.1
  Top Layer w15: U3.6@2480,1350 2526.78,1350 U3.6@2544.61,1367.83 ; U3.6@2480,1380 2488.98,1371.02 2492.17,1367.83 U3.6@2522.17,1367.83 ; U3.6@2510,1380 U3.6@2522.17,1367.83 ; U3.6@2540,1350 2544.61,1354.61 U3.6@2544.61,1367.83 ; U3.6@2540,1380 2540,1372.45 U3.6@2544.61,1367.83 ; U3.6@2552.17,1367.83 U3.6@2544.61,1367.83 ; U3.6@2522.17,1367.83 U3.6@2544.61,1367.83
  Bottom Layer w8: v1(2006.19,1484.32) 2006.48,1484.03 2006.48,1429.62 v1(2006.77,1429.34)
  other v1: 2240,1480 2260,1480 2280,1480 2240,1500 2260,1500 2280,1500 2240,1520 2260,1520 2280,1520
  other v2: 2406.96,1348.99 2436.96,1348.99 2466.96,1348.99 2496.96,1348.99 2526.96,1348.99 2406.96,1378.99 2436.96,1378.99 2466.96,1378.99 2496.96,1378.99 2526.96,1378.99
SC: C9.2 J2.2 R18.1 U1.25 U4.1 U4.6 | length 643.7
  Top Layer w8: U1.25 1895.31,1371.73 1938.54,1328.5 C9.2 1971.5,1330 1995.99,1330 2004.56,1321.43 v1(2007.9,1321.43) ; v1(2051.95,1350.38) 2052.33,1350 2130,1350 2199.26,1280.74 2200.64,1280.74 2210,1271.38 R18.1@2210,1270 ; v1(2240.33,1289.45) v1(2260.33,1289.45)
  Top Layer w15: U4.6@2480,1130 2526.96,1130 U4.6@2536.78,1130 ; U4.6@2480,1160 2502.17,1137.83 U4.6@2522.17,1137.83 ; U4.6@2510,1160 2522.17,1147.83 U4.6@2522.17,1137.83 ; U4.6@2540,1130 2544.61,1134.61 U4.6@2544.61,1137.83 ; U4.6@2540,1160 2540,1142.45 U4.6@2544.61,1137.83 ; U4.6@2566.78,1160 U4.6@2570,1160 ; U4.6@2522.17,1137.83 U4.6@2544.61,1137.83
  Bottom Layer w8: v1(2007.9,1321.43) 2010.58,1324.12 2022.89,1324.12 2049.15,1350.38 v1(2051.95,1350.38)
  other v1: 2240.33,1249.45 2260.33,1249.45 2280.33,1249.45 2240.33,1269.45 2260.33,1269.45 2280.33,1269.45 2280.33,1289.45
  other v2: 2406.96,1128.99 2436.96,1128.99 2466.96,1128.99 2496.96,1128.99 2526.96,1128.99 2406.96,1158.99 2436.96,1158.99 2466.96,1158.99 2496.96,1158.99 2526.96,1158.99
TACHO: U1.7 U5.5 | length 452.4
  Top Layer w6: U5.5 1270.16,1370.16 1360,1460 1460,1460 1469.05,1469.05 1509.6,1469.05 U1.7
TACHO_OB: J3.B15 U5.12 | length 1167.4
  Top Layer w6: U5.12 1270.54,1119.85 1270.54,1073.41 v3(1270.93,1073.03)
  Bottom Layer w6: v3(1270.93,1073.03) 1270,1072.1 1270,1040 1304.62,1005.38 1665.38,1005.38 1792,1132 1976.85,1132 2029.98,1078.87 2058.87,1078.87 2082.83,1054.91 J3.B15
VCC: C1.2 C13.2 C14.2 C15.2 C16.1 C17.1 C18.1 C19.1 C20.1 J3.A1 J3.A2 J3.A3 J3.A4 J3.A5 J3.A6 J3.A7 J3.A8 J3.A9 J3.A10 J3.A11 U1.24 U1.45 U2.8 U3.8 U4.8 | length 2216
  Top Layer w8: 1630.06,1689.29 1630.06,1650.02 U1.45
  Top Layer w10: U1.24 1788.27,1330 1788.27,1358.27 1800,1370 1800,1593.85 1812.84,1606.69
  Top Layer w12: 1630.06,1689.29 1600,1719.35 1600,1750 1610,1760 1870,1760 1880,1750 1880,1638.28 1849.89,1608.17 1814.33,1608.17 ; U1.24@1790,1330 1840,1330 1900,1270 2072.97,1270 2080,1262.97 2080,1170 2170,1080 2330,1080 2397.8,1012.21 J3.A9@2397.8,860 ; U2.8@2543.37,1709.57 U2.8@2544.61,1709.57
  Top Layer w15: U3.8@2466.2,1444.75 2517.19,1444.75 U3.8@2544.61,1472.17 ; U4.8@2466.45,1215.26 2517.71,1215.26 U4.8@2544.61,1242.17 ; U2.8@2467.06,1668.01 2518.29,1668.01 U2.8@2545.59,1695.31
  Bottom Layer w12: C15.2 2368.46,1202.93 2374.27,1208.74 2378.2,1208.74 2381.49,1212.03 2391.19,1212.03 v2(2393.41,1214.25) ; C14.2 2368.46,1432.93 2374.27,1438.74 2378.2,1438.74 2380.98,1441.51 2390.94,1441.51 v2(2393.16,1443.74) ; C13.2 2368.46,1652.93 2380.31,1664.78 2391.8,1664.78 v1(2394.02,1667)
VDSTH: C7.2 R2.2 R5.1 U1.23 | length 265.1
  Top Layer w8: U1.23@1768.24,1310.36 1768.89,1309.71 1768.89,1264.66 v1(1769.2,1264.35)
  Top Layer w10: U1.23@1768.24,1310.36 U1.23
  Top Layer w20: C7.2 1700.69,1172.19 1700.69,1190 1700.69,1197.92 v3(1701.39,1198.61) 1702.37,1198.61 1710.98,1190 R2.2@1744.25,1190 ; R2.2 R5.1@1788.5,1191.5
  Bottom Layer w10: v3(1701.39,1198.61) 1721.39,1198.61 1769.2,1246.43 v1(1769.2,1264.35)
VREF: C8.2 R1.2 R4.2 U1.20 | length 265.9
  Top Layer w8: C8.2 1653.15,1171.5 1660.96,1179.31 1660.96,1200.96 1709.53,1249.53 U1.20
  Top Layer w20: R1.2 R4.2 ; R4.2@1600,1171.01 1600.48,1171.5 C8.2
pads on no net: J1.6 J1.MH1 J1.MH2 J1.MH_C J2.4 J2.MH1 J3.A13 J3.A17 J3.A18 J3.B12 J3.B13 J3.B14

## Polygon pours and split planes (outlines as drawn)
SC on Bottom Layer "NONET_L01_P-001" (solid, pour order 15): 2612.6,1102.6 2970,1460 2970,1580 2940,1610 2881.01,1610 2848.28,1577.28 2848.28,1477.92 2672.33,1302.78 2380,1302.78 2380,1102.6
GND_R on Bottom Layer "NONET_L01_P-001" (solid, pour order 11): 2230,1130 2160,1200 2110,1200 2110,1760 2320,1760 2320,1130
SB on Bottom Layer "NONET_L01_P-001" (solid, pour order 25): 2770.35,1310 2965,1504.65 2965,1745 2940,1770 2780,1770 2540,1530 2380,1530 2380,1310
SB on Bottom Layer "NONET_L01_P-001" (solid, pour order 4): 2386.96,1328.99 2556.96,1328.99 2556.96,1398.99 2416.96,1538.99 2216.96,1538.99 2216.96,1458.99 2316.96,1458.99 2386.96,1388.99
SA on Bottom Layer "NONET_L01_P-001" (solid, pour order 24): 2640,1540 2750,1650 2750,1740 2720,1770 2640,1770 2380,1770 2380,1540
SA on Bottom Layer "NONET_L01_P-001" (solid, pour order 1): 2386.96,1548.99 2556.96,1548.99 2556.96,1618.99 2406.96,1768.99 2216.96,1768.99 2216.96,1678.99 2316.96,1678.99 2386.96,1608.99
SC on Bottom Layer "NONET_L01_P-001" (solid, pour order 5): 2386.96,1101.59 2556.96,1101.59 2556.96,1171.59 2419.56,1308.99 2216.96,1308.99 2216.96,1231.59 2316.96,1231.59 2386.96,1161.59
AGND on Bottom Layer "NONET_L01_P-001" (solid, remove dead copper, pour order 28): 2726.34,777.49 2112.51,777.49 1990,900 1120,900 1120,1970 3540,1970 3540,900 2726.34,900
AGND on Top Layer "NONET_L01_P-001" (solid, remove dead copper, pour order 30): 3050,1870 3380,1870 3380,900 3050,900
SB on Top Layer "NONET_L01_P-001" (solid, pour order 13): 2363.34,1464.76 2183.34,1464.76 2183.34,1544.76 2363.34,1544.76
GND_R on Top Layer "NONET_L01_P-001" (solid, pour order 10): 2361.96,1598.99 2311.96,1548.99 2171.96,1548.99 2171.96,1658.99 2361.96,1658.99
GND_R on Top Layer "NONET_L01_P-001" (solid, pour order 9): 2356.76,1381.34 2306.76,1331.34 2166.76,1331.34 2166.76,1441.34 2356.76,1441.34
VCC on Top Layer "NONET_L01_P-001" (solid, remove dead copper, pour order 7): 2305.82,777.42 2680,777.42 2680,820 2726,820 2726,956 2780,1010 2830,1010 2830,1740 2820,1750 2460,1750 2460,1150 2370,1060 2305.82,995.82
SC on Top Layer "NONET_L01_P-001" (solid, pour order 12): 2356.96,1228.99 2176.96,1228.99 2176.96,1308.99 2356.96,1308.99
GND_R on Top Layer "NONET_L01_P-001" (solid, pour order 8): 2356.96,1148.99 2336.96,1128.99 2206.96,1128.99 2166.96,1168.99 2166.96,1208.99 2356.96,1208.99
AGND on Top Layer "NONET_L01_P-001" (solid, pour order 21): 2940,1470 2940,900 2820,900 2820,1470
AGND on Top Layer "NONET_L01_P-001" (solid, pour order 29): 1110,900 2040,900 2040,1080 1300,1080 1300,1850 1320,1870 1110,1870
AGND on Top Layer "NONET_L01_P-001" (solid, remove dead copper, pour order 22): 1250.47,1250.35 1439.68,1249.68 1440,1140 1470,1140 1480,1130 1790,1130 1790,1000 1250.47,1000
AGND on Top Layer "NONET_L01_P-001" (solid, pour order 23): 1592.1,1750 1480,1750 1480,1590 1540,1590 1570,1620 1592.1,1620
5V on Top Layer "NONET_L01_P-001" (solid, pour order 20): 1540,1550 1510,1580 1340,1580 1340,1520 1540,1520
SA on Top Layer "NONET_L01_P-001" (solid, pour order 14): 2356.96,1686.39 2176.96,1686.39 2176.96,1758.99 2356.96,1758.99

## Other copper
Bottom Layer:
  pour cut-out: 2220,720 2305.43,720 2305.43,960.68 2214.57,960.68 2214.57,725.43
  pour cut-out: 2940,1430 2940,870 2950,870 2950,1440
  pour cut-out: 2740,720 2825.43,720 2825.43,960.68 2726.76,960.68 2726.76,733.24

## Silkscreen, mask and mechanical layers (free items; w line width, h text height)
Top Overlay:
  text "MOTOR" at 3444,1566 h32 r90
  text "HALL" at 3444,1116 h32 r90
  text "DIR" at 2064,976 h32 r90
  text "PWM" at 2104,976 h32 r90
  text "MODE" at 2144,976 h32 r90
  text "CS" at 2214,976 h32 r90
Bottom Overlay:
  text "UBC TBOTS MotorDriver V3.1 - A3931" at 3131,1789 h54
  text "MOTOR" at 3444,1714 h32 r90
  text "HALL" at 3444,1234 h32 r90
  text "PCIE x1" at 2624,1026 h32
  text "RST" at 1949.32,975.91 h32 r270
  text "FF2" at 1996.65,975.91 h32 r270
  text "FF1" at 2046,976 h32 r270
  text "TACHO" at 2088.83,973.45 h32 r270
Mechanical 15:
  lines w8: 1120,899.37 1120,1870 3460,1870 3460,899.87 3203.21,899.37 2883.33,899.37 2883.33,983.02 ccw(c2811.48,983.02) 2739.63,983.02 2739.63,763.22 2718.89,742.48 2316.59,742.48 2297.49,761.57 2297.49,767.04 2297.49,1017.99 ccw(c2260.09,1017.99) 2222.69,1017.99 2222.69,762.03 2203.09,742.43 1958.57,742.43 1940,761.01 1939.17,983.2 ccw(c1867.32,983.2) 1795.47,983.2 1795.44,904.82 1790,899.37 1120,899.37

## Dimensions
3460,1870 to 2718.66,722.2 on Mechanical 16
1120,1870 to 3460,1870 on Mechanical 16